# Altium PCB PCB_MCU.PcbDoc
Units mil, origin at the board's own origin, x right, y up, seen from the top; angles counter-clockwise.
Board outline 6000 x 4000 mil, 2 copper layers (Top Layer, Bottom Layer); 136 components, 94 nets, 500 pads, 0 vias.
Unrouted connection lines stored in the file: 332.
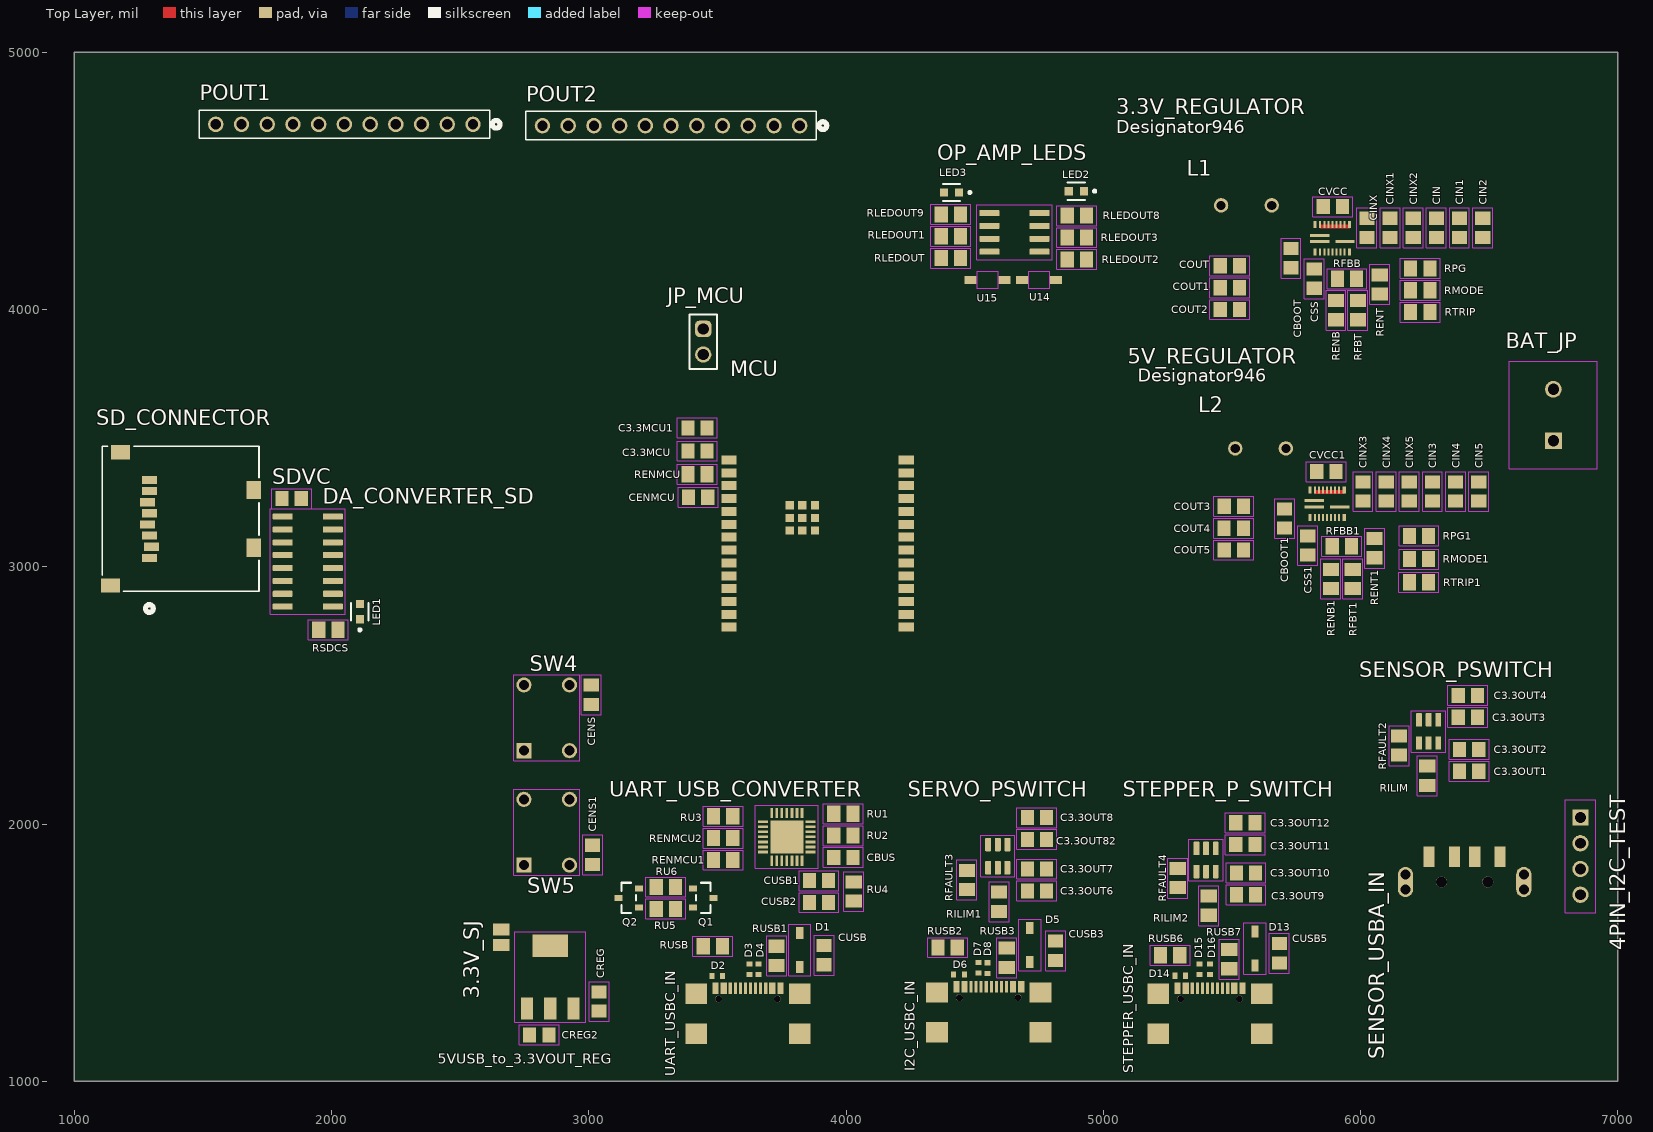
[diagram p0: Top Layer view]
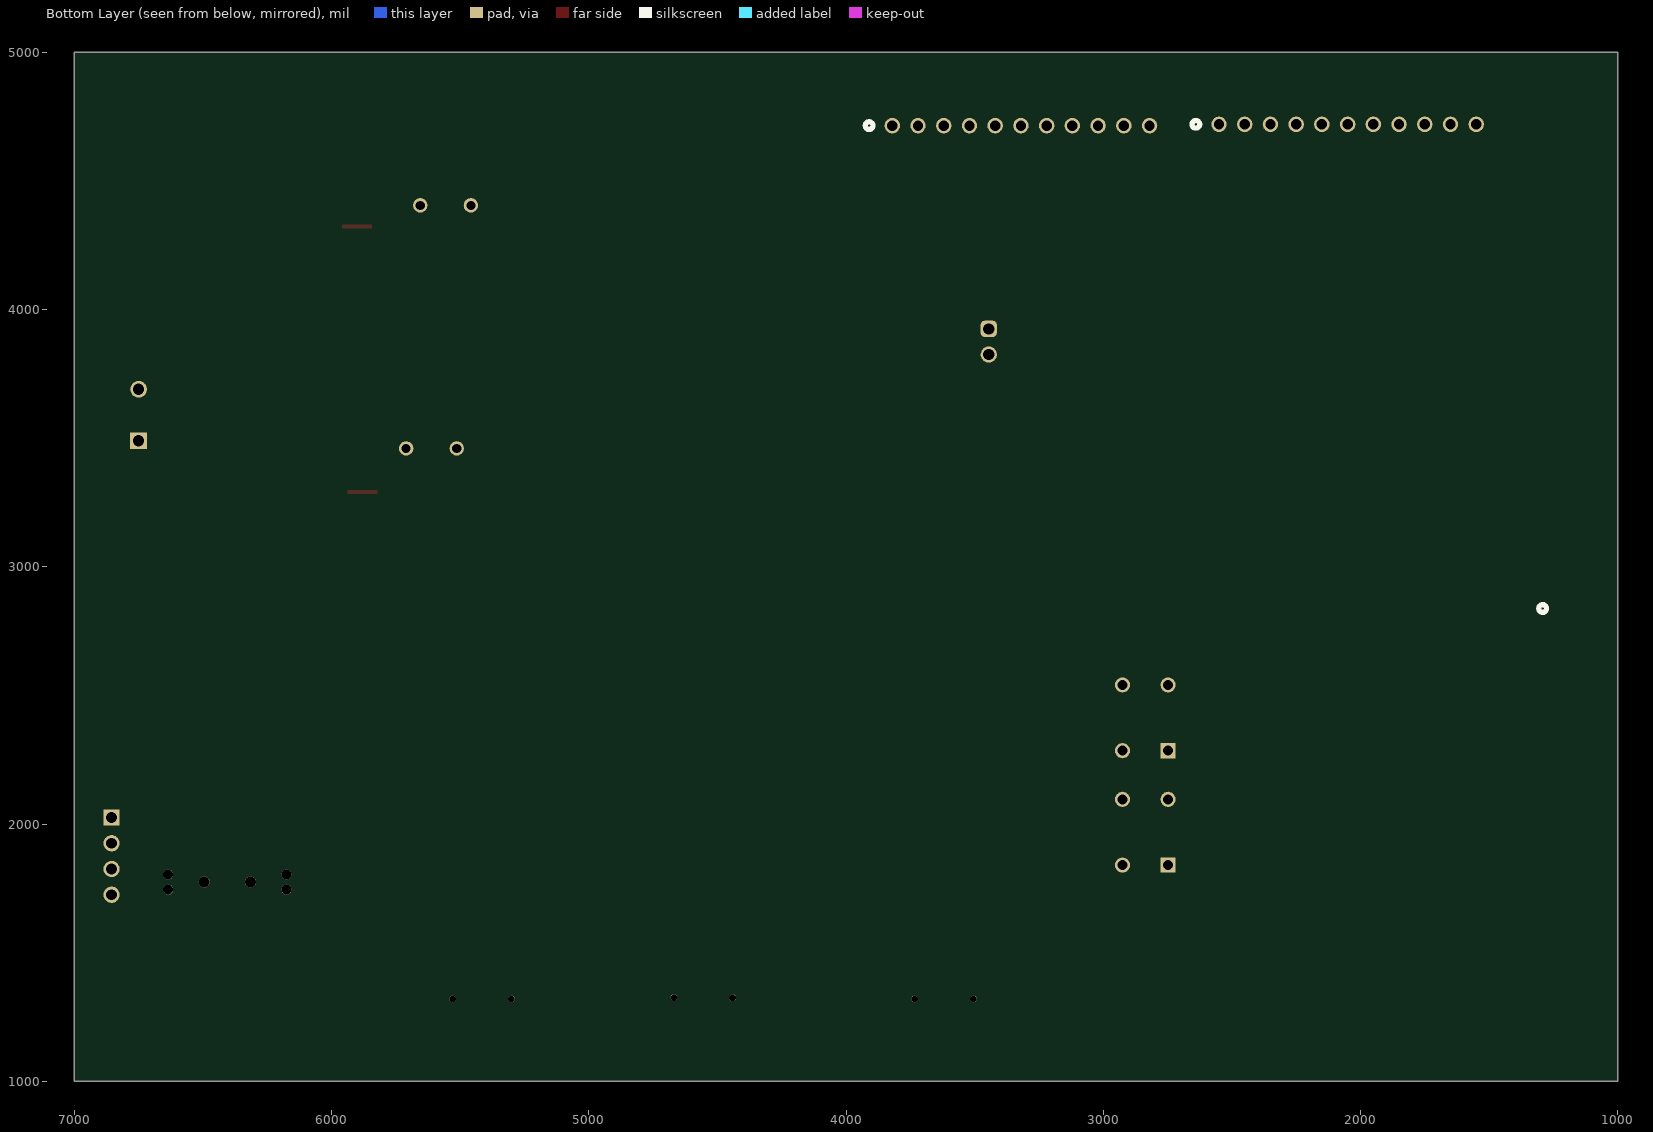
[diagram p1: Bottom Layer view, seen from below]

## Layer stack, top to bottom
Top Solder: solder mask 0.4, Solder Resist, Dk 3.5
Top Layer: signal copper 1.4
Dielectric 1: dielectric 12.6, FR-4, Dk 4.8
Bottom Layer: signal copper 1.4
Bottom Solder: solder mask 0.4, Solder Resist, Dk 3.5

## Board outline
1000,1000 7000,1000 7000,5000 1000,5000

## Design rules (kind name [scope] priority, off if disabled: settings)
Clearance [All] p1: gap=10 ignorepadtopadclearanceinfootprint=FALSE except(0: Arc-Hole Track-Hole SMDPad-Hole THPad-Hole Via-Hole Fill-Hole Poly-Hole Region-Hole Text-Hole)
PolygonConnect [All] p1: connectstyle=Relief reliefconductorwidth=10 reliefentries=4 polygonreliefangle="90 Angle" airgapwidth=10
RoutingVias [All] p1: holewidth=28 width=50 viastyle="Through Hole" minholewidth=28 minwidth=50 maxholewidth=28 maxwidth=50
SolderMaskExpansion [All] p1: expansion=4 istentingtop=FALSE
Width [All] p1: maxlimit=10 minlimit=10 preferedwidth=10
30 further rules are at their usual default settings.

## Components (designator, comment, footprint, x,y, rotation, side; value= is the part's Value field where it differs from the comment)
3.3V_REGULATOR "TPS54JA20RWWR" RWW0021A 5890.79,4276.81 r90 top
3.3V_SJ "" SJ 2660,1560 r90 top
4PIN_I2C_TEST "PPTC041LFBN-RC" SULLINS_PPTC041LFBN-RC 6855,1875 r270 top
5V_REGULATOR "TPS54JA20RWWR" RWW0021A 5870,3245 r90 top
5VUSB_to_3.3VOUT_REG "" SOT230P700X185-4N 2850,1405 r90 top
BAT_JP "282837-2" TE_282837-2 6750,3590 r90 top
C3.3MCU "22uF" C0805 3422.6,3450 r180 top
C3.3MCU1 "0.1uF" C0805 3422.6,3540 r180 top
C3.3OUT1 "120uF" C0805 6422.4,2205 r0 top
C3.3OUT2 "0.1uF" C0805 6422.6,2290 r0 top
C3.3OUT3 "0.1uF" C0805 6417.4,2415 r180 top
C3.3OUT4 "10uF" C0805 6417.4,2500 r180 top
C3.3OUT6 "0.1uF" C0805 4742.4,1740 r0 top
C3.3OUT7 "120uF" C0805 4742.4,1825 r0 top
C3.3OUT8 "10uF" C0805 4742.4,2025 r180 top
C3.3OUT9 "120uF" C0805 5555,1725 r0 top
C3.3OUT10 "0.1uF" C0805 5555,1810 r0 top
C3.3OUT11 "0.1uF" C0805 5552.4,1920 r180 top
C3.3OUT12 "10uF" C0805 5552.4,2005 r180 top
C3.3OUT82 "0.1uF" C0805 4742.4,1940 r180 top
CBOOT "100nF" C0805 5730,4200 r90 top
CBOOT1 "100nF" C0805 5705,3187.6 r90 top
CBUS "1uF" C0805 3990,1870 r0 top
CENMCU "0.1uF" C0805 3425,3270 r180 top
CENS "0.1uF" C0805 3010,2502.4 r270 top
CENS1 "0.1uF" C0805 3015,1880 r270 top
CIN "4.7uF" C0805 6295,4317.6 r90 top
CIN1 "4.7uF" C0805 6385,4317.4 r90 top
CIN2 "4.7uF" C0805 6475,4317.4 r90 top
CIN3 "4.7uF" C0805 6280,3292.6 r90 top
CIN4 "4.7uF" C0805 6370,3292.6 r90 top
CIN5 "4.7uF" C0805 6460,3292.6 r90 top
CINX "1uF" C0805 6025,4317.6 r90 top
CINX1 "1uF" C0805 6115,4317.6 r90 top
CINX2 "1uF" C0805 6205,4317.6 r90 top
CINX3 "1uF" C0805 6010,3292.6 r90 top
CINX4 "1uF" C0805 6100,3292.6 r90 top
CINX5 "1uF" C0805 6190,3292.6 r90 top
COUT "10uF" C0805 5492.6,4170 r180 top
COUT1 "10uF" C0805 5492.6,4085 r180 top
COUT2 "10uF" C0805 5492.6,4000 r180 top
COUT3 "10uF" C0805 5507.6,3235 r180 top
COUT4 "10uF" C0805 5507.4,3150 r180 top
COUT5 "10uF" C0805 5507.6,3065 r180 top
CREG "10uF" C0805 3040,1310 r90 top
CREG2 "22uF" C0805 2807.4,1180 r180 top
CSS "82nF" C0805 5820,4120 r270 top
CSS1 "82nF" C0805 5795,3082.6 r270 top
CUSB "10uF" C0805 3915,1490 r270 top
CUSB1 "0.1uF" C0805 3895,1780 r180 top
CUSB2 "4.7uF" C0805 3895,1695 r180 top
CUSB3 "10uF" C0805 4815,1507.4 r270 top
CUSB5 "10uF" C0805 5685,1497.6 r270 top
CVCC "2.2uF" C0805 5892.6,4400 r0 top
CVCC1 "2.2uF" C0805 5867.4,3370 r0 top
D1 "1N5819HW-7-F" SOD3715X145N 3820,1509.91 r270 top
D2 "CPDQ5V0-HF" MBTB-D-SOD-923F-IMP-0402 3499.33,1409.91 r0 top
D3 "CPDQ5V0-HF" MBTB-D-SOD-923F-IMP-0402 3625,1435.67 r270 top
D4 "CPDQ5V0-HF" MBTB-D-SOD-923F-IMP-0402 3660,1435.67 r270 top
D5 "1N5819HW-7-F" SOD3715X145N 4715,1530 r270 top
D6 "CPDQ5V0-HF" MBTB-D-SOD-923F-IMP-0402 4439.33,1415 r0 top
D7 "CPDQ5V0-HF" MBTB-D-SOD-923F-IMP-0402 4515,1440.67 r270 top
D8 "CPDQ5V0-HF" MBTB-D-SOD-923F-IMP-0402 4550,1440 r270 top
D13 "1N5819HW-7-F" SOD3715X145N 5590,1516.14 r270 top
D14 "CPDQ5V0-HF" MBTB-D-SOD-923F-IMP-0402 5299.33,1410 r0 top
D15 "CPDQ5V0-HF" MBTB-D-SOD-923F-IMP-0402 5375,1435.67 r270 top
D16 "CPDQ5V0-HF" MBTB-D-SOD-923F-IMP-0402 5415,1435.67 r270 top
DA_CONVERTER_SD "CD74HC4050MT" SOIC127P600X175-16N 1907.56,3020 r0 top
I2C_USBC_IN "USB4110-GF-A" USB4110-GF-A_GCT 4555,1235 r0 top
JP_MCU "61300211121" 61300211121 3445,3875 r270 top
L1 "680nH" 6000-XXXX-RC 5556.57,4405 r180 top
L2 "1uH" 6000-XXXX-RC 5611.57,3460 r180 top
LED1 "LTST-C190GKT" FP-LTST-C190GKT-MFG 2110,2825.47 r90 top
LED2 "LTST-C190GKT" FP-LTST-C190GKT-MFG 4895.47,4460 r180 top
LED3 "LTST-C190GKT" FP-LTST-C190GKT-MFG 4410.47,4455 r180 top
MCU "ESP32-C6-WROOM-1-N8" MOD28_ESP32-C6-WROOM-1_EXP 3889.49,3207.91 r0 top
OP_AMP_LEDS "LM358DR" SOIC127P599X175-8N 4655,4300 r0 top
POUT1 "PPTC111LFBN-RC" CONN11_PPPN111_SUL 2550,4720 r180 top
POUT2 "PPTC111LFBN-RC" CONN11_PPPN111_SUL 3820,4715 r180 top
Q1 "SS8050-G" FP-SS8050-G-MFG 3444.76,1712.6 r0 top
Q2 "SS8050-G" FP-SS8050-G-MFG 3155.24,1712.6 r180 top
RENB "10k" M0805 5905,3997.6 r90 top
RENB1 "10k" M0805 5885,2952.6 r90 top
RENMCU "10k" M0805 3422.6,3360 r0 top
RENMCU1 "0R" M0805 3522.6,1860 r0 top
RENMCU2 "0R" M0805 3522.6,1945 r0 top
RENT "66.5k" M0805 6075,4097.4 r90 top
RENT1 "66.5k" M0805 6055,3072.4 r90 top
RFAULT2 "10k" M0805 6150,2305 r90 top
RFAULT3 "10k" M0805 4470,1782.4 r90 top
RFAULT4 "10k" M0805 5290,1790 r90 top
RFBB "10k" M0805 5947.6,4120 r0 top
RFBB1 "10k" M0805 5927.4,3080 r0 top
RFBT "26.7k" M0805 5990,3997.6 r270 top
RFBT1 "45.3k" M0805 5970,2952.6 r270 top
RILIM "20k" M0805 6260,2187.6 r90 top
RILIM1 "20k" M0805 4595,1697.6 r90 top
RILIM2 "20k" M0805 5410,1682.4 r90 top
RLEDOUT "10k" M0805 4407.6,4200 r180 top
RLEDOUT1 "10k" M0805 4407.6,4285 r180 top
RLEDOUT2 "10k" M0805 4897.4,4195 r0 top
RLEDOUT3 "10k" M0805 4897.4,4280 r0 top
RLEDOUT8 "2.2k" M0805 4897.4,4365 r180 top
RLEDOUT9 "2.2k" M0805 4407.6,4370 r0 top
RMODE "30.1k" M0805 6232.4,4075 r180 top
RMODE1 "30.1k" M0805 6227.6,3030 r180 top
RPG "30.1k" M0805 6232.4,4160 r0 top
RPG1 "30.1k" M0805 6227.6,3120 r180 top
RSDCS "2.2k" M0805 1987.6,2755 r0 top
RTRIP "6.98k" M0805 6232.4,3990 r180 top
RTRIP1 "12.1k" M0805 6227.4,2940 r180 top
RU1 "10k" M0805 3990,2040 r180 top
RU2 "2k" M0805 3990,1955 r0 top
RU3 "47.5k" M0805 3522.6,2030 r0 top
RU4 "22.1k" M0805 4030,1737.6 r270 top
RU5 "10k" M0805 3300,1670 r0 top
RU6 "10k" M0805 3300,1755 r180 top
RUSB "5.1k" M0805 3482.6,1525 r180 top
RUSB1 "5.1k" M0805 3730,1487.31 r90 top
RUSB2 "5.1k" M0805 4395,1520 r180 top
RUSB3 "5.1k" M0805 4625,1480 r90 top
RUSB6 "5.1k" M0805 5260,1490 r180 top
RUSB7 "5.1k" M0805 5490,1475 r90 top
SD_CONNECTOR "1660" CONN_1660_ADA 1413.07,3186.14 r90 top
SDVC "0.7uF" C0805 1845,3265 r0 top
SENSOR_PSWITCH "AP22653W6-7" SOT95P280X145-6N 6265,2360 r270 top
SENSOR_USBA_IN "USB-AP-S-RA-SMT" CONN_USB-AP-S-RA-SMT_ADM 6405,1484.91 r0 top
SERVO_PSWITCH "AP22653W6-7" SOT95P280X145-6N 4590,1874.92 r270 top
STEPPER_P_SWITCH "AP22653W6-7" SOT95P280X145-6N 5400,1860 r270 top
STEPPER_USBC_IN "USB4110-GF-A" USB4110-GF-A_GCT 5415,1229.91 r0 top
SW4 "1825910-6" SW_1825910-6-4 2836.42,2412.95 r90 top
SW5 "1825910-6" SW_1825910-6-4 2836.42,1967.95 r90 top
U14 "MMSZ5225BT1G" SOD-123_ONS 4750,4115 r180 top
U15 "MMSZ5230BT1G" SOD-123_ONS 4550,4115 r0 top
UART_USB_CONVERTER "CP2102N-A02-GQFN28" QFN50P500X500X80-29N 3770,1950 r90 top
UART_USBC_IN "USB4110-GF-A" USB4110-GF-A_GCT 3619,1229.91 r0 top

## Footprints (in the part's own frame and the unit in brackets; to place one, negate y for a bottom-side part, rotate by r counter-clockwise, add the part's x,y. Pads: shape width x height; smd on the part's side, far side on the other; paste and mask are expansions set on the pad)
6000-XXXX-RC [mil]
  round 56 hole 35.43: 1(-98.43,0) 2(98.43,0)
61300211121 [mm] "Pin Header, pitch 2.54 mm, THT, Vertical, single row, 2p"
  rrect50% 1.6x1.6 hole 1.1: 1(-1.27,0)
  round 1.6 hole 1.1: 2(1.27,0)
  silkscreen extent -2.69,-1.35 2.69,1.35, body extent -2.54,-1.27 2.54,1.27, height 8.57
C0805 [mil]
  rect 51.18x59.06 smd: 1(-37.4,0) 2(37.4,0)
  Top Layer keep-out lines w2: 77.68,38.7 -77.68,38.7 -77.68,-38.7 77.68,-38.7 77.68,38.7
CONN11_PPPN111_SUL [mil]
  round 60 hole 40 paste-99999 mask+0: 1(0,0) 2(100,0) 3(200,0) 4(300,0) 5(400,0) 6(500,0) 7(600,0) 8(700,0) 9(800,0) 10(900,0) 11(1000,0)
  silkscreen extent -105,-55 1065,55, body extent -60,-50 1060,50, height 335
CONN_1660_ADA [mil]
  rect 32x59 smd paste+0 mask+0: 1(-151.57,120.87) 2(-108.27,112.99) 3(-64.96,120.87) 4(-21.65,128.74) 5(21.65,120.87) 6(64.96,128.74) 7(108.27,120.87) 8(151.57,120.87)
  rect 71x55 smd paste-35.5 mask-35.5: 9(-112.2,-284.65) 10(112.2,-284.65)
  rect 55x75 smd paste-37.5 mask-37.5: 13(-258.86,272.44) 14(258.86,233.07)
  silkscreen extent -363,-305 282,305
CONN_USB-AP-S-RA-SMT_ADM [mil]
  rect 43x79 smd: 1(-137.8,387.5) 2(-39.37,387.5) 3(39.37,387.5) 4(137.8,387.5)
  round 43 hole 43: 5(-90,290) 6(90,290)
  rrect100% 59x118 smd: 7(-230,289.5) 8(230,289.5)
  round 39 hole 39: S_1_H1(-230,319) S_1_H2(-230,260) S_2_H1(230,319) S_2_H2(230,260)
FP-LTST-C190GKT-MFG [mm]
  rect 0.8x0.8 smd paste+0 mask+0: 1(-0.75,0) 2(0.75,0)
  silkscreen extent -1.92,-0.85 0.85,0.85, body extent -1.25,-0.55 1.25,0.55, height 0.25
FP-SS8050-G-MFG [mm]
  rect 0.8x0.6 smd paste+0 mask+0: 1(-1.01,0.95) 2(-1.01,-0.95) 3(1.01,0)
  silkscreen extent -0.7,-1.5 0.7,1.5, body extent -1.51,-1.6 1.51,1.6, height 0.25
M0805 [mil]
  rect 51.18x62.99 smd: 1(-37.4,0) 2(37.4,0)
  Top Layer keep-out lines w2: -77.68,38.7 -77.68,-38.7 77.68,-38.7 77.68,38.7 -77.68,38.7
MBTB-D-SOD-923F-IMP-0402 [mm]
  rect 0.5x0.6 smd: 1(-0.525,0) 2(0.525,0)
MOD28_ESP32-C6-WROOM-1_EXP [mil]
  rect 59x35 smd: 1(-344.49,207.09) 2(-344.49,157.09) 3(-344.49,107.09) 4(-344.49,57.09) 5(-344.49,7.09) 6(-344.49,-42.91) 7(-344.49,-92.91) 8(-344.49,-142.91) 9(-344.49,-192.91) 10(-344.49,-242.91) 11(-344.49,-292.91) 12(-344.49,-342.91) 13(-344.49,-392.91) 14(-344.49,-442.91) 15(344.49,-442.91) 16(344.49,-392.91) 17(344.49,-342.91) 18(344.49,-292.91) 19(344.49,-242.91) 20(344.49,-192.91) 21(344.49,-142.91) 22(344.49,-92.91) 23(344.49,-42.91) 24(344.49,7.09) 25(344.49,57.09) 26(344.49,107.09) 27(344.49,157.09) 28(344.49,207.09)
  rect 32x32 smd: 29(-59.25,-18.11) 30(-108.46,31.1) 31(-108.46,-18.11) 32(-108.46,-67.32) 33(-59.25,-67.32) 34(-10.04,-67.32) 35(-10.04,-18.11) 36(-10.04,31.1) 37(-59.25,31.1)
QFN50P500X500X80-29N [mm]
  rect 0.99x0.27 smd: 1(-2.36,1.5) 2(-2.36,1) 3(-2.36,0.5) 4(-2.36,0) 5(-2.36,-0.5) 6(-2.36,-1) 7(-2.36,-1.5) 15(2.36,-1.5) 16(2.36,-1) 17(2.36,-0.5) 18(2.36,0) 19(2.36,0.5) 20(2.36,1) 21(2.36,1.5)
  rect 0.27x0.99 smd: 8(-1.5,-2.36) 9(-1,-2.36) 10(-0.5,-2.36) 11(0,-2.36) 12(0.5,-2.36) 13(1,-2.36) 14(1.5,-2.36) 22(1.5,2.36) 23(1,2.36) 24(0.5,2.36) 25(0,2.36) 26(-0.5,2.36) 27(-1,2.36) 28(-1.5,2.36)
  rect 3.25x3.25 smd paste+0: 29(0,0)
  Top Layer keep-out lines w0.05: -3.105,3.105 -3.105,-3.105 3.105,-3.105 3.105,3.105 -3.105,3.105
RWW0021A [mm]
  rect 0.7x0.3 smd paste+0 mask+0.051: 1(-1.35,1.7) 9(-1.35,-1.7) 11(1.35,-1.7) 19(1.35,1.7)
  rect 0.7x0.2 smd paste+0 mask+0.051: 2(-1.35,1.2) 3(-1.35,0.8) 4(-1.35,0.4) 5(-1.35,0) 6(-1.35,-0.4) 7(-1.35,-0.8) 8(-1.35,-1.2) 12(1.35,-1.2) 13(1.35,-0.8) 14(1.35,-0.4) 15(1.35,0) 16(1.35,0.4) 17(1.35,0.8) 18(1.35,1.2)
  rect 0.3x1.9 smd paste-0.937 mask+0.051: 10(-0.3,-1.25) 20(0.3,1.25) 21(-0.3,1.25)
  Top Layer region: 1,1.2 1,-1.7 1.35,-1.7 1.35,1.2
  body extent -1.5,-2 1.5,2, height 1
SJ [mil]
  rect 46x63 smd: 1(-30,0) 2(30,0)
SOD3715X145N [mm]
  rect 1.21x0.73 smd: A(1.68,0) C(-1.68,0)
  Top Layer keep-out lines w0.05: 2.535,-1.1 2.535,1.1 -2.535,1.1 -2.535,-1.1 2.535,-1.1
SOD-123_ONS [mil]
  rect 48x30 smd: 1(-66,0) 2(66,0)
  Top Layer keep-out region: -40,33.5 40,33.5 40,-33.5 -40,-33.5 -40,33.5
SOIC127P599X175-8N [mil]
  rrect25% 77.56x23.62 smd: 1(-97.24,75) 2(-97.24,25) 3(-97.24,-25) 4(-97.24,-75) 5(97.24,-75) 6(97.24,-25) 7(97.24,25) 8(97.24,75)
  Top Layer keep-out lines w1.97: -145.87,-106.4 145.87,-106.4 145.87,106.4 -145.87,106.4 -145.87,-106.4
SOIC127P600X175-16N [mil]
  rrect25% 77.56x23.62 smd: 1(-97.44,175) 2(-97.44,125) 3(-97.44,75) 4(-97.44,25) 5(-97.44,-25) 6(-97.44,-75) 7(-97.44,-125) 8(-97.44,-175) 9(97.44,-175) 10(97.44,-125) 11(97.44,-75) 12(97.44,-25) 13(97.44,25) 14(97.44,75) 15(97.44,125) 16(97.44,175)
  Top Layer keep-out lines w1.97: -146.06,-204.72 146.06,-204.72 146.06,204.72 -146.06,204.72 -146.06,-204.72
SOT95P280X145-6N [mil]
  rrect25% 51.97x23.23 smd: 1(-45.08,37.4) 2(-45.08,0) 3(-45.08,-37.4) 4(45.08,-37.4) 5(45.08,0) 6(45.08,37.4)
  Top Layer keep-out lines w1.97: 80.91,-66.93 -80.91,-66.93 -80.91,66.93 80.91,66.93 80.91,-66.93
SOT230P700X185-4N [mil]
  rect 86.61x47.24 smd: 1(-122.05,90.55) 2(-122.05,0) 3(-122.05,-90.55)
  rect 86.61x137.8 smd: 4(122.05,0)
  Top Layer keep-out lines w1.97: -175.2,137.8 -175.2,-137.8 175.2,-137.8 175.2,137.8 -175.2,137.8
SULLINS_PPTC041LFBN-RC [mil]
  rect 63.2x63.2 / inner round 58.38 / far side rect 63.2x63.2 hole 42.13: 1(-150,0)
  round 63.2 hole 42.13: 2(-50,0) 3(50,0) 4(150,0)
  Top Layer keep-out lines w1.97: 219.69,-59.84 -219.69,-59.84 -219.69,59.84 219.69,59.84 219.69,-59.84
SW_1825910-6-4 [mil]
  rect 58.98x58.98 / inner round 54.49 / far side rect 58.98x58.98 hole 38.98: 1(-127.95,88.58)
  round 58.98 hole 38.98: 2(127.95,88.58) 3(-127.95,-88.58) 4(127.95,-88.58)
  Top Layer keep-out lines w1.97: -167.32,127.95 -167.32,-127.95 167.32,-127.95 167.32,127.95 -167.32,127.95
TE_282837-2 [mil]
  rect 64.97x64.97 / inner round 60.02 / far side rect 64.97x64.97 hole 43.31: 1(-100,0)
  round 64.97 hole 43.31: 2(100,0)
  Top Layer keep-out lines w1.97: -209.84,171.26 209.84,171.26 209.84,-171.26 -209.84,-171.26 -209.84,171.26
USB4110-GF-A_GCT [mil]
  round 26 hole 26: 13(-114,90) 14(114,90)
  rect 85x79 smd: 15(-201.18,109.76) 16(201.18,109.76) 17(-201.18,-44.97) 18(201.18,-44.97)
  rect 24x45 smd: A1-B12(-125.98,132.39) A4-B9(-94.49,132.39) A9-B4(94.49,132.39) A12-B1(125.98,132.39)
  rect 12x45 smd: A5(-49.21,132.39) A6(-9.84,132.39) A7(9.84,132.39) A8(49.21,132.39) B5(68.9,132.39) B6(29.53,132.39) B7(-29.53,132.39) B8(-68.9,132.39)

## Part data
3.3V_REGULATOR 5V_REGULATOR: "No Description Available", MFR_NAME="Texas Instruments", COPYRIGHT="Copyright (C) 2023 Ultra Librarian. All rights reserved.", MANUFACTURER_PART_NUMBER=TPS54JA20RWWR, RefDes=RefDes, TYPE=DEV
3.3V_SJ: library part SJ, DeviceSetName=SJ, GateName_1=1, LibraryName=jumper, PACKAGE=SJ, POPULARITY=33, SymbolName_1=SJ
4PIN_I2C_TEST: "4 Position Header Connector Through Hole  Check availability", PACKAGE=None, AVAILABILITY="In Stock", CHECK_PRICES=https://www.snapeda.com/parts/PPTC041LFBN-RC/Sullins+Connector+Solutions/view-part/?ref=eda, DeviceSetName=PPTC041LFBN-RC, GateName_1=G$1, LibraryName=PPTC041LFBN-RC, MF="Sullins Connector", MP=PPTC041LFBN-RC, PRICE=None, PURCHASE-URL="https://www.snapeda.com/api/url_track_click_mouser/?unipart_id=285917&manufacturer=Sullins Connector&part_name=PPTC041LFBN-RC&search_term=pptc041lfbn-rc", SNAPEDA_LINK=https://www.snapeda.com/parts/PPTC041LFBN-RC/Sullins+Connector+Solutions/view-part/?ref=snap, SymbolName_1=PPTC041LFBN-RC
5VUSB_to_3.3VOUT_REG: library part AZ1117IH-3.3TRG1, PACKAGE=SOT230P700X185-4N, AVAILABILITY="In Stock", CHECK_PRICES=https://www.snapeda.com/parts/AZ1117IH-3.3TRG1/Diodes+Inc./view-part/?ref=eda, DeviceSetName=AZ1117IH-3.3TRG1, GateName_1=G$1, LibraryName=AZ1117IH-3.3TRG1, MF="Diodes Inc.", MP=AZ1117IH-3.3TRG1, PRICE=None, PURCHASE-URL="https://www.snapeda.com/api/url_track_click_mouser/?unipart_id=490259&manufacturer=Diodes Inc.&part_name=AZ1117IH-3.3TRG1&search_term=az1117ih-3.3trg1", SNAPEDA_LINK=https://www.snapeda.com/parts/AZ1117IH-3.3TRG1/Diodes+Inc./view-part/?ref=snap, SymbolName_1=AZ1117IH-3.3TRG1
BAT_JP: "TERM BLOCK 5.08MM 2POS SIDE ENTY Check availability", PACKAGE=None, AVAILABILITY="In Stock", CHECK_PRICES=https://www.snapeda.com/parts/282837-2/TE+Connectivity+AMP+Connectors/view-part/?ref=eda, DeviceSetName=282837-2, GateName_1=G$1, LibraryName=Terminal_Block2P, MF="TE Connectivity", MP=282837-2, PRICE=None, PURCHASE-URL=https://pricing.snapeda.com/search?q=282837-2&ref=eda, SNAPEDA_LINK=https://www.snapeda.com/parts/282837-2/TE+Connectivity+AMP+Connectors/view-part/?ref=snap, SymbolName_1=282837-2
C3.3MCU C3.3MCU1 C3.3OUT1 C3.3OUT2 C3.3OUT3 C3.3OUT4 C3.3OUT6 C3.3OUT7 C3.3OUT8 C3.3OUT9 C3.3OUT10 C3.3OUT11 C3.3OUT12 C3.3OUT82 CBOOT CBOOT1 CBUS CENMCU CENS CENS1 CIN CIN1 CIN2 CIN3 CIN4 CIN5 CINX CINX1 CINX2 CINX3 CINX4 CINX5 COUT COUT1 COUT2 COUT3 COUT4 COUT5 CREG CREG2 CSS CSS1 CUSB CUSB1 CUSB2 CUSB3 CUSB5 CVCC CVCC1 SDVC: library part C-EUC0805, "CAPACITOR, European symbol", DeviceName=C0805, DeviceSetName=C-EU, GateName_1=G$1, LibraryName=rcl, POPULARITY=88, SPICEPREFIX=C, SymbolName_1=C-EU
D1 D5 D13: "1N5819HW Series 40 V 1 A Surface Mount Schottky Barrier Rectifier - SOD-123 Check availability", PACKAGE="SOD-123 Fairchild Semiconductor", AVAILABILITY="In Stock", CHECK_PRICES=https://www.snapeda.com/parts/1N5819HW-7-F/Diodes+Inc./view-part/?ref=eda, DeviceSetName=1N5819HW-7-F, GateName_1=G$1, LibraryName=1N5819HW-7-F, MF="Diodes Inc.", MP=1N5819HW-7-F, PRICE=None, PURCHASE-URL="https://www.snapeda.com/api/url_track_click_mouser/?unipart_id=42272&manufacturer=Diodes Inc.&part_name=1N5819HW-7-F&search_term=1n5819hw-7-f", SNAPEDA_LINK=https://www.snapeda.com/parts/1N5819HW-7-F/Diodes+Inc./view-part/?ref=snap, SymbolName_1=1N5819HW-7-F
D2 D3 D4 D6 D7 D8 D14 D15 D16: "ESD Suppressors / TVS Diodes SMD ESD Diode 5V Bi-Direction   Source:  Datasheet   Check availability", PACKAGE="0402 Comchip", AVAILABILITY="In Stock", CHECK_PRICES=https://www.snapeda.com/parts/CPDQ5V0-HF/Comchip+Technology/view-part/?ref=eda, DeviceSetName=CPDQ5V0-HF, GateName_1=G$1, LibraryName=CPDQ5V0-HF, MF="Comchip Technology", MP=CPDQ5V0-HF, PRICE=None, PURCHASE-URL="https://www.snapeda.com/api/url_track_click_mouser/?unipart_id=809934&manufacturer=Comchip Technology&part_name=CPDQ5V0-HF&search_term=cpdq5v0-hf", SNAPEDA_LINK=https://www.snapeda.com/parts/CPDQ5V0-HF/Comchip+Technology/view-part/?ref=snap, SymbolName_1=CPDQ5V0-HF
DA_CONVERTER_SD: "Check availability", PACKAGE="SOIC-16 Texas Instruments", AVAILABILITY="In Stock", CHECK_PRICES=https://www.snapeda.com/parts/CD74HC4050MT/Texas+Instruments/view-part/?ref=eda, DeviceSetName=CD74HC4050MT, GateName_1=A, LibraryName=CD74HC4050MT, MF="Texas Instruments", MP=CD74HC4050MT, PRICE=None, PURCHASE-URL="https://www.snapeda.com/api/url_track_click_mouser/?unipart_id=1170164&manufacturer=Texas Instruments&part_name=CD74HC4050MT&search_term=cd74hc4050", SNAPEDA_LINK=https://www.snapeda.com/parts/CD74HC4050MT/Texas+Instruments/view-part/?ref=snap, SymbolName_1=CD74HC4050MT
I2C_USBC_IN STEPPER_USBC_IN UART_USBC_IN: MFR_NAME="Global Connector Technology", COPYRIGHT="Copyright (C) 2023 Ultra Librarian. All rights reserved.", DeviceSetName=USB4110-GF-A, GateName_1=A, LibraryName=USB4110-GF-A, MANUFACTURER_PART_NUMBER=USB4110-GF-A, SymbolName_1=USB4110-GF-A
JP_MCU: library part CMP-1712-00002-5, Color=Black, Contact Resistance=20mΩ, Current Rating=3A, Max Operating Temperature=125°C, Min Operating Temperature=-40°C, Operating Supply Voltage=250V, Connector Type="Male Pin", Contact Gender=Male, Contact Material=Copper, Contact Mating Length=5.9944mm, Contact Plating=Gold, Gender=Male, Height=8.94mm, Housing Material=PBT, Lead Free="Lead Free", Lead Pitch=2.54mm, Mount="Through Hole", NexarPartId=20081794, Number of Contacts=2, Number of Pins=2, Number of Positions=2, Number of Rows=1, Orientation=Vertical, Packaging=Bulk, Pitch=2.54mm, REACH SVHC="No SVHC", RoHS=Compliant, Termination="Through Hole", Voltage Rating=250V
L1 L2: library part L-US6000-XXX-RC, "INDUCTOR, American symbol", DeviceName=6000-XXX-RC, DeviceSetName=L-US, GateName_1=G$1, LibraryName=rcl, POPULARITY=5, SPICEPREFIX=L, SymbolName_1=L-US
LED1 LED2 LED3: library part CMP-22017-000005-2, "LED GREEN CLEAR CHIP SMD", Case Code (Imperial)=0603, Case Code (Metric)=1608, Color=Green, Forward Current=30mA, Forward Voltage=2.1V, Lens Color=Colorless, Max Operating Temperature=85°C, Min Operating Temperature=-55°C, Package Quantity=1, Power Dissipation=100mW, Reverse Voltage=5V, Test Current=10mA, Voltage=2V, Case/Package=0603, Depth=0.8mm, Dominant Wavelength=569nm, Height=0.8mm, Illumination Color=Green, Lead Free="Lead Free", Length=1.6mm, Lens Style=Clear, Lens Transparency=Clear, Luminous Intensity=6mcd, Mount="Surface Mount", Number of Elements=1, Number of LEDs=1, Number of Pins=2, Packaging="Tape and Reel", Power Rating=100mW, Radiation Hardening=No, Viewing Angle=130°, Wavelength=565nm, Width=0.8mm
MCU: MFR_NAME="Espressif Systems", COPYRIGHT="Copyright (C) 2023 Ultra Librarian. All rights reserved.", DeviceSetName=ESP32-C6-WROOM-1-N8, GateName_1=A, LibraryName=ESP32-C6-WROOM-1U, MANUFACTURER_PART_NUMBER=ESP32-C6-WROOM-1-N8, SymbolName_1=ESP32-C6-WROOM-1(U), TYPE=RF
OP_AMP_LEDS: "Check availability", PACKAGE="SOIC-8 Texas Instruments", AVAILABILITY="In Stock", CHECK_PRICES=https://www.snapeda.com/parts/LM358DR/Texas+Instruments/view-part/?ref=eda, DeviceSetName=LM358DR, GateName_1=A, LibraryName=LM358DR, MF="Texas Instruments", MP=LM358DR, PRICE=None, PURCHASE-URL="https://www.snapeda.com/api/url_track_click_mouser/?unipart_id=6639&manufacturer=Texas Instruments&part_name=LM358DR&search_term=lm358dr", SNAPEDA_LINK=https://www.snapeda.com/parts/LM358DR/Texas+Instruments/view-part/?ref=snap, SymbolName_1=LM358DR
POUT1 POUT2: "No Description Available", MFR_NAME=Sullins, COPYRIGHT="Copyright (C) 2023 Ultra Librarian. All rights reserved.", MANUFACTURER_PART_NUMBER=PPTC111LFBN-RC, RefDes=RefDes, TYPE=DEV
Q1 Q2: library part CMP-20235-000001-1, "NPN TRANSISTOR 1.5A 40V SOT-23 R", Case/Package=TO-236-3, Collector Emitter Breakdown Voltage=25V, Collector Emitter Voltage (VCEO)=400mV, Max Collector Current=1.5A, Max Power Dissipation=300mW, Transition Frequency=100MHz, Max Breakdown Voltage=25V, Mount="Surface Mount", Packaging="Tape and Reel", RoHS Compliant=Yes
RENB RENB1 RENMCU RENMCU1 RENMCU2 RENT RENT1 RFAULT2 RFAULT3 RFAULT4 RFBB RFBB1 RFBT RFBT1 RILIM RILIM1 RILIM2 RLEDOUT RLEDOUT1 RLEDOUT2 RLEDOUT3 RLEDOUT8 RLEDOUT9 RMODE RMODE1 RPG RPG1 RSDCS RTRIP RTRIP1 RU1 RU2 RU3 RU4 RU5 RU6 RUSB RUSB1 RUSB2 RUSB3 RUSB6 RUSB7: library part R-US_M0805, "RESISTOR, American symbol", DeviceName=M0805, DeviceSetName=R-US_, GateName_1=G$1, LibraryName=rcl, POPULARITY=45, SPICEPREFIX=R, SymbolName_1=R-US
SD_CONNECTOR: "No Description Available", MFR_NAME="Adafruit Industries", COPYRIGHT="Copyright (C) 2023 Ultra Librarian. All rights reserved.", MANUFACTURER_PART_NUMBER=1660, RefDes=RefDes, TYPE=DEV
SENSOR_PSWITCH SERVO_PSWITCH STEPPER_P_SWITCH: "Power Switch/Driver 1:1 P-Channel 2.1A SOT-23-6  Check availability", PACKAGE="SOT-23-6 Diodes Incorporated", AVAILABILITY="In Stock", CHECK_PRICES=https://www.snapeda.com/parts/AP22653W6-7/Diodes+Inc./view-part/?ref=eda, DeviceSetName=AP22653W6-7, GateName_1=G$1, LibraryName=AP22653W6-7, MF="Diodes Incorporated", MP=AP22653W6-7, PRICE=None, PURCHASE-URL="https://www.snapeda.com/api/url_track_click_mouser/?unipart_id=4792807&manufacturer=Diodes Incorporated&part_name=AP22653W6-7&search_term=ap22653w6-7", SNAPEDA_LINK=https://www.snapeda.com/parts/AP22653W6-7/Diodes+Inc./view-part/?ref=snap, SymbolName_1=AP22653W6-7
SENSOR_USBA_IN: MFR_NAME="ADAM TECHNOLOGIES INC", COPYRIGHT="Copyright (C) 2023 Ultra Librarian. All rights reserved.", DeviceSetName=USB-AP-S-RA-SMT, GateName_1=A, LibraryName=USB-AP-S-RA-SMT, MANUFACTURER_PART_NUMBER=USB-AP-S-RA-SMT, SymbolName_1=CONN_004P_000C_1
SW4 SW5: "Switch Tactile OFF (ON) SPST Round Button PC Pins 0.05A 24VDC 100000Cycles 1.57N Thru-Hole Loose Check availability", PACKAGE=None, AVAILABILITY="In Stock", CHECK_PRICES=https://www.snapeda.com/parts/1825910-6/TE+Connectivity+ALCOSWITCH+Switches/view-part/?ref=eda, DeviceSetName=1825910-6, GateName_1=G$1, LibraryName=1825910-6, MF="TE Connectivity", MP=1825910-6, PRICE=None, PURCHASE-URL="https://www.snapeda.com/api/url_track_click_mouser/?unipart_id=226996&manufacturer=TE Connectivity&part_name=1825910-6&search_term=1825910-6", SNAPEDA_LINK=https://www.snapeda.com/parts/1825910-6/TE+Connectivity+ALCOSWITCH+Switches/view-part/?ref=snap, SymbolName_1=1825910-6
U14 U15: MFR_NAME=onsemi, COPYRIGHT="Copyright (C) 2023 Ultra Librarian. All rights reserved.", GateName_1=A
  U14: DeviceSetName=MMSZ5225BT1G, LibraryName=MMSZ5225BT1G, MANUFACTURER_PART_NUMBER=MMSZ5225BT1G, SymbolName_1=MMSZ5225BT1G
  U15: DeviceSetName=MMSZ5230BT1G, LibraryName=MMSZ5230BT1G, MANUFACTURER_PART_NUMBER=MMSZ5230BT1G, SymbolName_1=MMSZ5230BT1G
UART_USB_CONVERTER: "Check availability", PACKAGE="WFQFN-28 Silicon Labs", AVAILABILITY="In Stock", CHECK_PRICES=https://www.snapeda.com/parts/CP2102N-A02-GQFN28/Silicon+Labs/view-part/?ref=eda, DeviceSetName=CP2102N-A02-GQFN28, GateName_1=G$1, LibraryName=CP2102N-A02-GQFN28, MF="Silicon Labs", MP=CP2102N-A02-GQFN28, PRICE=None, PURCHASE-URL="https://www.snapeda.com/api/url_track_click_mouser/?unipart_id=4872321&manufacturer=Silicon Labs&part_name=CP2102N-A02-GQFN28&search_term=cp2102n-a02-gqfn28", SNAPEDA_LINK=https://www.snapeda.com/parts/CP2102N-A02-GQFN28/Silicon+Labs/view-part/?ref=snap, SymbolName_1=CP2102N-A02-GQFN28

## Nets (pads, with @x,y where several pads share a name; then routed paths per layer and width w, separated by ;. In a path a pad name is that pad's centre, name@x,y a point inside that pad or via, vN(x,y) a via of type N, cw(c..) or ccw(c..) an arc to the next point about the centre after c; other vN are vias at no path point)
3.3USBA: C3.3OUT1.1 C3.3OUT2.1 SENSOR_PSWITCH.6 SENSOR_USBA_IN.1
3.3VOUT: 3.3V_SJ.2 C3.3OUT3.2 C3.3OUT4.2 C3.3OUT11.2 C3.3OUT12.2 COUT1.1 COUT2.1 COUT.1 CUSB1.2 CUSB2.2 DA_CONVERTER_SD.1 JP_MCU.1 L1.2 LED2.2 OP_AMP_LEDS.8 POUT1.9 RFAULT2.2 RFAULT4.2 RFBT.2 RLEDOUT2.2 RLEDOUT3.2 RU2.2 SD_CONNECTOR.4 SDVC.1 SENSOR_PSWITCH.1 STEPPER_P_SWITCH.1 UART_USB_CONVERTER.6 UART_USB_CONVERTER.7
5VINUSB1: C3.3OUT6.1 C3.3OUT7.1 CUSB3.1 D5.C SERVO_PSWITCH.6
5VINUSB21: C3.3OUT9.1 C3.3OUT10.1 CUSB5.1 D13.C STEPPER_P_SWITCH.6
5VIOUT: C3.3OUT8.2 C3.3OUT82.2 RFAULT3.2 SERVO_PSWITCH.1
5VOUT: 4PIN_I2C_TEST.1 COUT3.1 COUT4.1 COUT5.1 L2.2 LED3.2 POUT1.1 RFBT1.2 RLEDOUT1.2 RLEDOUT.2
5VUSBOUT: 5VUSB_to_3.3VOUT_REG.3 CREG.1
12VIN: 3.3V_REGULATOR.10 3.3V_REGULATOR.21 5V_REGULATOR.10 5V_REGULATOR.21 BAT_JP.2 CIN1.1 CIN2.1 CIN3.1 CIN4.1 CIN5.1 CIN.1 CINX1.1 CINX2.1 CINX3.1 CINX4.1 CINX5.1 CINX.1 RENT1.2 RENT.2
D+: D4.2 UART_USB_CONVERTER.4 UART_USBC_IN.A6 UART_USBC_IN.B6
D-: D3.2 UART_USB_CONVERTER.5 UART_USBC_IN.A7 UART_USBC_IN.B7
DTR: Q2.2 RU6.2 UART_USB_CONVERTER.28
EN: CENMCU.1 CENS.1 MCU.3 Q1.3 RENMCU.1 SW4.4
FSPICLK: DA_CONVERTER_SD.3 DA_CONVERTER_SD.9 MCU.6 POUT1.4
FSPID: DA_CONVERTER_SD.5 MCU.7 POUT1.5
FSPIQ: MCU.27 POUT1.6 SD_CONNECTOR.7
GND: 3.3V_REGULATOR.2 3.3V_REGULATOR.6 3.3V_REGULATOR.11 3.3V_REGULATOR.12 3.3V_REGULATOR.13 3.3V_REGULATOR.14 3.3V_REGULATOR.15 3.3V_REGULATOR.16 3.3V_REGULATOR.17 3.3V_REGULATOR.18 4PIN_I2C_TEST.4 5V_REGULATOR.2 5V_REGULATOR.11 5V_REGULATOR.12 5V_REGULATOR.13 5V_REGULATOR.14 5V_REGULATOR.15 5V_REGULATOR.16 5V_REGULATOR.17 5V_REGULATOR.18 5VUSB_to_3.3VOUT_REG.1 BAT_JP.1 C3.3MCU1.2 C3.3MCU.2 C3.3OUT1.2 C3.3OUT2.2 C3.3OUT3.1 C3.3OUT4.1 C3.3OUT6.2 C3.3OUT7.2 C3.3OUT8.1 C3.3OUT9.2 C3.3OUT10.2 C3.3OUT11.1 C3.3OUT12.1 C3.3OUT82.1 CBUS.2 CENMCU.2 CENS1.2 CENS.2 CIN1.2 CIN2.2 CIN3.2 CIN4.2 CIN5.2 CIN.2 CINX1.2 CINX2.2 CINX3.2 CINX4.2 CINX5.2 CINX.2 COUT1.2 COUT2.2 COUT3.2 COUT4.2 COUT5.2 COUT.2 CREG2.2 CREG.2 CSS.2 CUSB1.1 CUSB2.1 CUSB3.2 CUSB5.2 CUSB.2 CVCC1.2 CVCC.2 D2.1 D3.1 D4.1 D6.1 D7.1 D8.1 D14.1 D15.1 D16.1 DA_CONVERTER_SD.8 DA_CONVERTER_SD.11 DA_CONVERTER_SD.14 I2C_USBC_IN.A1-B12 I2C_USBC_IN.A12-B1 MCU.1 MCU.28 MCU.29 MCU.30 MCU.31 MCU.32 MCU.33 MCU.34 MCU.35 MCU.36 MCU.37 OP_AMP_LEDS.4 POUT2.11 RENB1.1 RENB.1 RFBB1.1 RFBB.1 RILIM1.1 RILIM2.1 RILIM.1 RMODE1.1 RMODE.1 RTRIP1.1 RTRIP.1 RU1.1 RU3.1 RUSB1.2 RUSB2.2 RUSB3.2 RUSB6.2 RUSB7.2 RUSB.2 SDVC.2 SENSOR_PSWITCH.2 SENSOR_USBA_IN.4 SERVO_PSWITCH.2 STEPPER_P_SWITCH.2 STEPPER_USBC_IN.A1-B12 STEPPER_USBC_IN.A12-B1 SW4.1 SW5.1 U14.2 U15.2 UART_USB_CONVERTER.1 UART_USB_CONVERTER.3 UART_USB_CONVERTER.23 UART_USB_CONVERTER.27 UART_USB_CONVERTER.29 UART_USBC_IN.A1-B12 UART_USBC_IN.A12-B1
GPIO1: MCU.9 SENSOR_PSWITCH.3
GPIO3: MCU.26 POUT2.7
GPIO5: MCU.5 POUT1.10
GPIO8: D16.2 MCU.10 POUT1.11 STEPPER_USBC_IN.A6 STEPPER_USBC_IN.B6
GPIO9: D15.2 MCU.15 POUT2.1 STEPPER_USBC_IN.A7 STEPPER_USBC_IN.B7
GPIO12: MCU.13 POUT2.2 SERVO_PSWITCH.3
GPIO13: MCU.14 POUT2.3 STEPPER_P_SWITCH.3
GPIO15: MCU.23 POUT2.4
GPIO19: MCU.17 POUT2.5
GPIO20: MCU.18 POUT2.6
GPIO21: MCU.19 POUT2.8
GPIO22: MCU.20 POUT2.9
GPIO23: MCU.21 POUT2.10
IO0: CENS1.1 MCU.8 Q2.3 SW5.4
MCUSCL: 4PIN_I2C_TEST.2 D8.2 I2C_USBC_IN.A6 I2C_USBC_IN.B6 MCU.11 POUT1.2 SENSOR_USBA_IN.3
MCUSDA: 4PIN_I2C_TEST.3 D7.2 I2C_USBC_IN.A7 I2C_USBC_IN.B7 MCU.12 POUT1.3 SENSOR_USBA_IN.2
MCUSDCS: DA_CONVERTER_SD.7 MCU.16 POUT1.8
Net3.3V_REGULATOR_1: 3.3V_REGULATOR.1 CBOOT.1
Net3.3V_REGULATOR_3: 3.3V_REGULATOR.3 RTRIP.2
Net3.3V_REGULATOR_4: 3.3V_REGULATOR.4 RMODE.2
Net3.3V_REGULATOR_5: 3.3V_REGULATOR.5 CSS.1
Net3.3V_REGULATOR_7: 3.3V_REGULATOR.7 RFBB.2 RFBT.1
Net3.3V_REGULATOR_8: 3.3V_REGULATOR.8 RENB.2 RENT.1
Net3.3V_REGULATOR_9: 3.3V_REGULATOR.9 RPG.2
Net3.3V_REGULATOR_19: 3.3V_REGULATOR.19 CVCC.1 RPG.1
Net3.3V_REGULATOR_20: 3.3V_REGULATOR.20 CBOOT.2 L1.1
Net3.3V_SJ_1: 3.3V_SJ.1 5VUSB_to_3.3VOUT_REG.2 5VUSB_to_3.3VOUT_REG.4 CREG2.1
Net5V_REGULATOR_1: 5V_REGULATOR.1 CBOOT1.1
Net5V_REGULATOR_3: 5V_REGULATOR.3 RTRIP1.2
Net5V_REGULATOR_4: 5V_REGULATOR.4 RMODE1.2
Net5V_REGULATOR_5: 5V_REGULATOR.5 CSS1.1
Net5V_REGULATOR_6: 5V_REGULATOR.6 CSS1.2
Net5V_REGULATOR_7: 5V_REGULATOR.7 RFBB1.2 RFBT1.1
Net5V_REGULATOR_8: 5V_REGULATOR.8 RENB1.2 RENT1.1
Net5V_REGULATOR_9: 5V_REGULATOR.9 RPG1.2
Net5V_REGULATOR_19: 5V_REGULATOR.19 CVCC1.1 RPG1.1
Net5V_REGULATOR_20: 5V_REGULATOR.20 CBOOT1.2 L2.1
NetC3.3MCU1_1: C3.3MCU1.1 C3.3MCU.1 JP_MCU.2 MCU.2 RENMCU.2
NetCBUS_1: CBUS.1 RU3.2 RU4.1 UART_USB_CONVERTER.8
NetCUSB_1: CUSB.1 D1.C
NetDA_CONVERTER_SD_2: DA_CONVERTER_SD.2 SD_CONNECTOR.5
NetDA_CONVERTER_SD_4: DA_CONVERTER_SD.4 SD_CONNECTOR.3
NetDA_CONVERTER_SD_10: DA_CONVERTER_SD.10 LED1.2
NetI2C_USBC_IN_A5: I2C_USBC_IN.A5 RUSB2.1
NetI2C_USBC_IN_B5: I2C_USBC_IN.B5 RUSB3.1
NetLED1_1: LED1.1 RSDCS.2
NetLED2_1: LED2.1 RLEDOUT8.1
NetLED3_1: LED3.1 RLEDOUT9.1
NetOP_AMP_LEDS_1: OP_AMP_LEDS.1 RLEDOUT9.2
NetOP_AMP_LEDS_2: OP_AMP_LEDS.2 RLEDOUT1.1
NetOP_AMP_LEDS_3: OP_AMP_LEDS.3 RLEDOUT.1 U15.1
NetOP_AMP_LEDS_5: OP_AMP_LEDS.5 RLEDOUT2.1 U14.1
NetOP_AMP_LEDS_6: OP_AMP_LEDS.6 RLEDOUT3.1
NetOP_AMP_LEDS_7: OP_AMP_LEDS.7 RLEDOUT8.2
NetQ1_1: Q1.1 RU6.1
NetQ2_1: Q2.1 RU5.1
NetRENMCU1_2: RENMCU1.2 UART_USB_CONVERTER.26
NetRENMCU2_2: RENMCU2.2 UART_USB_CONVERTER.25
NetRFAULT2_1: RFAULT2.1 SENSOR_PSWITCH.4
NetRFAULT3_1: RFAULT3.1 SERVO_PSWITCH.4
NetRFAULT4_1: RFAULT4.1 STEPPER_P_SWITCH.4
NetRILIM1_2: RILIM1.2 SERVO_PSWITCH.5
NetRILIM2_2: RILIM2.2 STEPPER_P_SWITCH.5
NetRILIM_2: RILIM.2 SENSOR_PSWITCH.5
NetRU1_2: RU1.2 UART_USB_CONVERTER.11
NetRU2_1: RU2.1 UART_USB_CONVERTER.9
NetRUSB1_1: RUSB1.1 UART_USBC_IN.B5
NetRUSB6_1: RUSB6.1 STEPPER_USBC_IN.A5
NetRUSB7_1: RUSB7.1 STEPPER_USBC_IN.B5
NetRUSB_1: RUSB.1 UART_USBC_IN.A5
RTS: Q1.2 RU5.2 UART_USB_CONVERTER.24
RXD0: MCU.24 RENMCU2.1
SDCD: MCU.4 POUT1.7 SD_CONNECTOR.9
SDCS: DA_CONVERTER_SD.6 RSDCS.1 SD_CONNECTOR.2
TXD0: MCU.25 RENMCU1.1
VBUS: D1.A D2.2 RU4.2 UART_USBC_IN.A4-B9 UART_USBC_IN.A9-B4
VBUS11: D5.A D6.2 I2C_USBC_IN.A4-B9 I2C_USBC_IN.A9-B4
VBUS21: D13.A D14.2 STEPPER_USBC_IN.A4-B9 STEPPER_USBC_IN.A9-B4
pads on no net: DA_CONVERTER_SD.12 DA_CONVERTER_SD.13 DA_CONVERTER_SD.15 DA_CONVERTER_SD.16 I2C_USBC_IN.13 I2C_USBC_IN.14 I2C_USBC_IN.15 I2C_USBC_IN.16 I2C_USBC_IN.17 I2C_USBC_IN.18 I2C_USBC_IN.A8 I2C_USBC_IN.B8 MCU.22 SD_CONNECTOR.1 SD_CONNECTOR.6 SD_CONNECTOR.8 SD_CONNECTOR.10 SD_CONNECTOR.13 SD_CONNECTOR.14 SENSOR_USBA_IN.5 SENSOR_USBA_IN.6 SENSOR_USBA_IN.7 SENSOR_USBA_IN.8 SENSOR_USBA_IN.S_1_H1 SENSOR_USBA_IN.S_1_H2 SENSOR_USBA_IN.S_2_H1 SENSOR_USBA_IN.S_2_H2 STEPPER_USBC_IN.13 STEPPER_USBC_IN.14 STEPPER_USBC_IN.15 STEPPER_USBC_IN.16 STEPPER_USBC_IN.17 STEPPER_USBC_IN.18 STEPPER_USBC_IN.A8 STEPPER_USBC_IN.B8 SW4.2 SW4.3 SW5.2 SW5.3 UART_USB_CONVERTER.2 UART_USB_CONVERTER.10 UART_USB_CONVERTER.12 UART_USB_CONVERTER.13 UART_USB_CONVERTER.14 UART_USB_CONVERTER.15 UART_USB_CONVERTER.16 UART_USB_CONVERTER.17 UART_USB_CONVERTER.18 UART_USB_CONVERTER.19 UART_USB_CONVERTER.20 UART_USB_CONVERTER.21 UART_USB_CONVERTER.22 UART_USBC_IN.13 UART_USBC_IN.14 UART_USBC_IN.15 UART_USBC_IN.16 UART_USBC_IN.17 UART_USBC_IN.18 UART_USBC_IN.A8 UART_USBC_IN.B8

## Text inside footprints (layer, text, board x,y; h text height)
3.3V_REGULATOR: Top Overlay "Designator946" at 5050,4685 h50
5V_REGULATOR: Top Overlay "Designator946" at 5135,3720 h50
I2C_USBC_IN: Mechanical 7 "*" at 4306,1342 h77.5; Mechanical 18 "Top Row Padstyle:RX24Y45D0T" at 3957,918 h77.5; Mechanical 18 "Middle Row Padstyle: RX24Y45D0T" at 3881,843 h77.5; Mechanical 18 "2nd Middle Row Padstyle: RX12Y45D0T" at 3790,768 h77.5; Mechanical 18 "Bottom Row Padstyle: RX24Y45D0T" at 3881,693 h77.5; Mechanical 18 "Second Bottom Row Padstyle: EX55Y55D32P" at 3700,618 h77.5; Mechanical 18 "Mounting Padstyle: EX26Y26D26P" at 3904,543 h77.5; Mechanical 18 "Second Mounting Padstyle: RX85Y79D0T" at 3768,468 h77.5; Mechanical 18 "Independent Mtg Hole 1 Padstyle: RX85Y79D0T" at 3616,393 h77.5; Mechanical 18 "Independent Mtg Hole 2 Padstyle: RX85Y79D0T" at 3616,318 h77.5; Mechanical 18 "Independent Mtg Hole 3 Padstyle: EX96Y96D96P" at 3593,243 h77.5; Mechanical 18 "Independent Mtg Hole 4 Padstyle: EX96Y96D96P" at 3593,168 h77.5; Mechanical 18 "Alt 1 Padstyle: OX60Y90D30P" at 3972,93 h77.5; Mechanical 18 "Alt 2 Padstyle: OX90Y60D30P" at 3972,18 h77.5; Mechanical 18 "0.252in/6.4mm" at 4419,1612 h38.75; Mechanical 18 "0in/0mm" at 4179,1387 h38.75; Mechanical 18 "0.228in/5.78mm" at 4407,1712 h38.75; Mechanical 18 "0.457in/11.608mm" at 4385,1812 h38.75; Mechanical 18 "0.067in/1.7mm" at 3934,1346 h38.75; Mechanical 18 "0.314in/7.976mm" at 3488,1223 h38.75; Mechanical 18 "-0.025in/-0.625mm" at 4903,1367 h38.75; Mechanical 18 "-0.025in/-0.625mm" at 5103,1367 h38.75; Mechanical 18 "0.201in/5.11mm" at 4508,1712 h38.75; Mechanical 18 "-0.201in/-5.11mm" at 4284,1612 h38.75; Mechanical 3 "*" at 4306,1342 h77.5
MCU: Mechanical 18 "1.004in/25.502mm" at 4453.49,3195.91 h38.75; Mechanical 18 "0.689in/17.5mm" at 3741.49,2587.91 h38.75; Mechanical 18 "0.049in/1.25mm" at 3657.49,2623.91 h38.75; Mechanical 18 "0.05in/1.27mm" at 3159.49,3027.91 h38.75; Mechanical 18 "0.059in/1.501mm" at 3110.49,2722.91 h38.75; Mechanical 18 "0.236in/5.994mm" at 4341.49,3579.91 h38.75; Mechanical 18 "0.709in/18.009mm" at 3719.49,3785.91 h38.75
SENSOR_USBA_IN: Mechanical 7 "*" at 6145,1846.91 h77.5; Mechanical 18 "Top Row Padstyle:RX43Y79D0T" at 5807,912.91 h77.5; Mechanical 18 "Middle Row Padstyle: RX43Y79D0T" at 5731,838.91 h77.5; Mechanical 18 "2nd Middle Row Padstyle: EX55Y55D32P" at 5618,762.91 h77.5; Mechanical 18 "Bottom Row Padstyle: EX55Y55D32P" at 5708,688.91 h77.5; Mechanical 18 "Second Bottom Row Padstyle: EX55Y55D32P" at 5550,612.91 h77.5; Mechanical 18 "Mounting Padstyle: OX43Y43D43P" at 5754,538.91 h77.5; Mechanical 18 "Second Mounting Padstyle: OX59Y118D0T" at 5595,462.91 h77.5; Mechanical 18 "Independent Mtg Hole 1 Padstyle: EX96Y96D96P" at 5443,388.91 h77.5; Mechanical 18 "Independent Mtg Hole 2 Padstyle: EX96Y96D96P" at 5443,312.91 h77.5; Mechanical 18 "Independent Mtg Hole 3 Padstyle: EX96Y96D96P" at 5443,238.91 h77.5; Mechanical 18 "Independent Mtg Hole 4 Padstyle: EX96Y96D96P" at 5443,162.91 h77.5; Mechanical 18 "Alt 1 Padstyle: OX60Y90D30P" at 5822,88.91 h77.5; Mechanical 18 "Alt 2 Padstyle: OX90Y60D30P" at 5822,12.91 h77.5; Mechanical 18 "0.46in/11.684mm" at 6246,2062.91 h38.75; Mechanical 18 "0.472in/11.989mm" at 6235,987.91 h38.75; Mechanical 18 "0.823in/20.904mm" at 6773,1472.91 h38.75; Mechanical 18 "0.122in/3.099mm" at 6786,1700.91 h38.75; Mechanical 18 "0.181in/4.597mm" at 6246,1993.91 h38.75; Mechanical 18 "0.098in/2.489mm" at 5739,1810.91 h38.75; Mechanical 3 "*" at 6145,1846.91 h77.5
STEPPER_USBC_IN: Mechanical 7 "*" at 5166,1336.91 h77.5; Mechanical 18 "-0.201in/-5.11mm" at 5144,1606.91 h38.75; Mechanical 18 "0.201in/5.11mm" at 5368,1706.91 h38.75; Mechanical 18 "-0.025in/-0.625mm" at 5963,1361.91 h38.75; Mechanical 18 "-0.025in/-0.625mm" at 5763,1361.91 h38.75; Mechanical 18 "0.314in/7.976mm" at 4348,1217.91 h38.75; Mechanical 18 "0.067in/1.7mm" at 4794,1340.91 h38.75; Mechanical 18 "0.457in/11.608mm" at 5245,1806.91 h38.75; Mechanical 18 "0.228in/5.78mm" at 5267,1706.91 h38.75; Mechanical 18 "0in/0mm" at 5039,1381.91 h38.75; Mechanical 18 "0.252in/6.4mm" at 5279,1606.91 h38.75; Mechanical 18 "Alt 2 Padstyle: OX90Y60D30P" at 4832,12.91 h77.5; Mechanical 18 "Alt 1 Padstyle: OX60Y90D30P" at 4832,87.91 h77.5; Mechanical 18 "Independent Mtg Hole 4 Padstyle: EX96Y96D96P" at 4453,162.91 h77.5; Mechanical 18 "Independent Mtg Hole 3 Padstyle: EX96Y96D96P" at 4453,237.91 h77.5; Mechanical 18 "Independent Mtg Hole 2 Padstyle: RX85Y79D0T" at 4476,312.91 h77.5; Mechanical 18 "Independent Mtg Hole 1 Padstyle: RX85Y79D0T" at 4476,387.91 h77.5; Mechanical 18 "Second Mounting Padstyle: RX85Y79D0T" at 4628,462.91 h77.5; Mechanical 18 "Mounting Padstyle: EX26Y26D26P" at 4764,537.91 h77.5; Mechanical 18 "Second Bottom Row Padstyle: EX55Y55D32P" at 4560,612.91 h77.5; Mechanical 18 "Bottom Row Padstyle: RX24Y45D0T" at 4741,687.91 h77.5; Mechanical 18 "2nd Middle Row Padstyle: RX12Y45D0T" at 4650,762.91 h77.5; Mechanical 18 "Middle Row Padstyle: RX24Y45D0T" at 4741,837.91 h77.5; Mechanical 18 "Top Row Padstyle:RX24Y45D0T" at 4817,912.91 h77.5; Mechanical 3 "*" at 5166,1336.91 h77.5
U14: Mechanical 18 "Default Padstyle: RX48Y30D0T" at 5349,4455 h77.5 r180; Mechanical 18 "Alt 1 Padstyle: OX60Y90D30P" at 5333,4530 h77.5 r180; Mechanical 18 "Alt 2 Padstyle: OX90Y60D30P" at 5333,4605 h77.5 r180; Mechanical 18 "0.152in/3.861mm" at 4909,3931 h38.75 r180; Mechanical 18 "0.02in/0.508mm" at 4964,4031 h38.75 r180; Mechanical 18 "0.028in/0.711mm" at 4554,4127 h38.75 r180; Mechanical 18 "0.071in/1.803mm" at 4474,4127 h38.75 r180; Mechanical 18 "0.112in/2.845mm" at 4909,4295 h38.75 r180; Mechanical 3 "*" at 4819,4140 h77.5 r180
U15: Mechanical 18 "Default Padstyle: RX48Y30D0T" at 3951,3775 h77.5; Mechanical 18 "Alt 1 Padstyle: OX60Y90D30P" at 3967,3700 h77.5; Mechanical 18 "Alt 2 Padstyle: OX90Y60D30P" at 3967,3625 h77.5; Mechanical 18 "0.152in/3.861mm" at 4391,4299 h38.75; Mechanical 18 "0.02in/0.508mm" at 4336,4199 h38.75; Mechanical 18 "0.028in/0.711mm" at 4746,4103 h38.75; Mechanical 18 "0.071in/1.803mm" at 4826,4103 h38.75; Mechanical 18 "0.112in/2.845mm" at 4391,3935 h38.75; Mechanical 3 "*" at 4481,4090 h77.5
UART_USBC_IN: Mechanical 7 "*" at 3370,1336.91 h77.5; Mechanical 18 "Top Row Padstyle:RX24Y45D0T" at 3021,912.91 h77.5; Mechanical 18 "Middle Row Padstyle: RX24Y45D0T" at 2945,837.91 h77.5; Mechanical 18 "2nd Middle Row Padstyle: RX12Y45D0T" at 2854,762.91 h77.5; Mechanical 18 "Bottom Row Padstyle: RX24Y45D0T" at 2945,687.91 h77.5; Mechanical 18 "Second Bottom Row Padstyle: EX55Y55D32P" at 2764,612.91 h77.5; Mechanical 18 "Mounting Padstyle: EX26Y26D26P" at 2968,537.91 h77.5; Mechanical 18 "Second Mounting Padstyle: RX85Y79D0T" at 2832,462.91 h77.5; Mechanical 18 "Independent Mtg Hole 1 Padstyle: RX85Y79D0T" at 2680,387.91 h77.5; Mechanical 18 "Independent Mtg Hole 2 Padstyle: RX85Y79D0T" at 2680,312.91 h77.5; Mechanical 18 "Independent Mtg Hole 3 Padstyle: EX96Y96D96P" at 2657,237.91 h77.5; Mechanical 18 "Independent Mtg Hole 4 Padstyle: EX96Y96D96P" at 2657,162.91 h77.5; Mechanical 18 "Alt 1 Padstyle: OX60Y90D30P" at 3036,87.91 h77.5; Mechanical 18 "Alt 2 Padstyle: OX90Y60D30P" at 3036,12.91 h77.5; Mechanical 18 "0.252in/6.4mm" at 3483,1606.91 h38.75; Mechanical 18 "0in/0mm" at 3243,1381.91 h38.75; Mechanical 18 "0.228in/5.78mm" at 3471,1706.91 h38.75; Mechanical 18 "0.457in/11.608mm" at 3449,1806.91 h38.75; Mechanical 18 "0.067in/1.7mm" at 2998,1340.91 h38.75; Mechanical 18 "0.314in/7.976mm" at 2552,1217.91 h38.75; Mechanical 18 "-0.025in/-0.625mm" at 3967,1361.91 h38.75; Mechanical 18 "-0.025in/-0.625mm" at 4167,1361.91 h38.75; Mechanical 18 "0.201in/5.11mm" at 3572,1706.91 h38.75; Mechanical 18 "-0.201in/-5.11mm" at 3348,1606.91 h38.75; Mechanical 3 "*" at 3370,1336.91 h77.5